# Altium PCB ZYNQ-HS-DEV-PCB.PcbDoc (part 3 of 10)
Units mm, origin at the board's own origin, x right, y up, seen from the top; angles counter-clockwise.
Board outline 125.25 x 111 mm, 10 copper layers (S1 (SIG), S2 (GND), S3 (SIG), S4 (GND), S5 (PWR), S6 (SIG), S7 (GND), S8 (SIG), S9 (GND), S10 (SIG)), stack 1.597 mm thick; 539 components, 408 nets, 2443 pads, 876 vias.
Unrouted connection lines stored in the file: 1310.
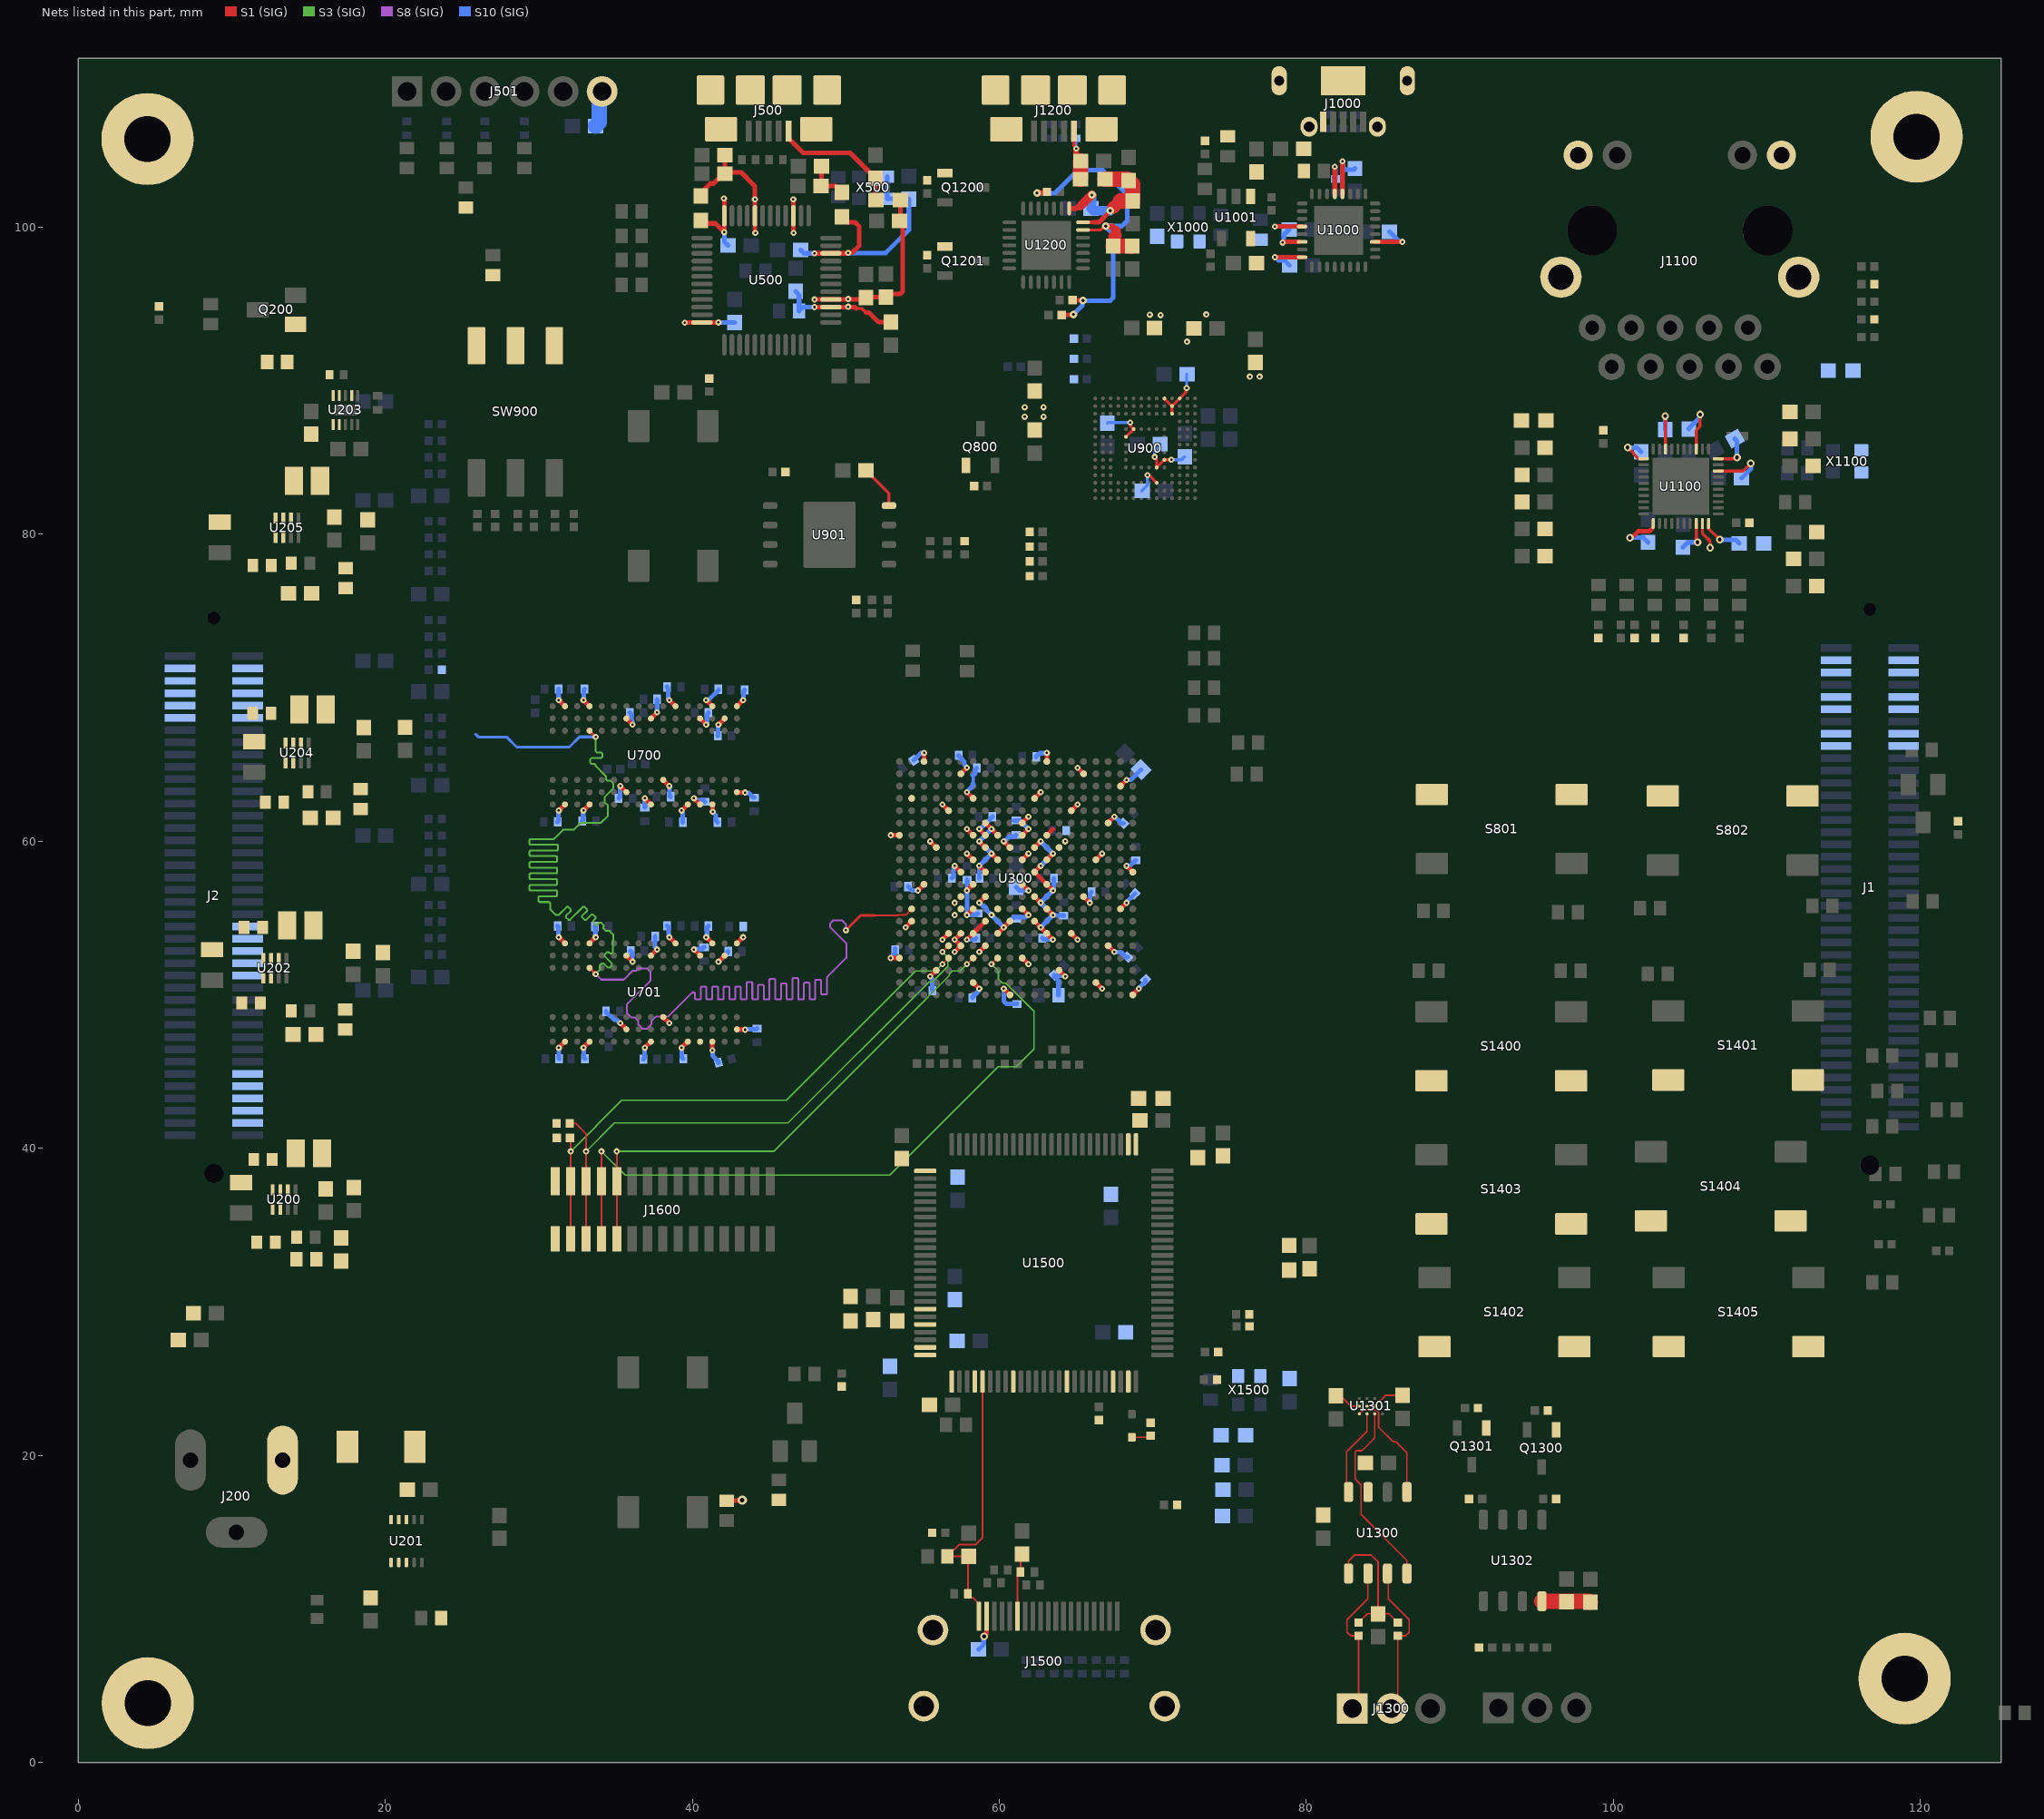
[diagram p8: the nets of this part, all layers, seen from the top]

## Part data
C200 C207 C215 C219: library part GRM1885C1H121JA01D, "CAP CER 120PF 50V C0G/NP0 0603 (1608) ±5%", Manufacturer="Murata Electronics", Package=0603, Tolerance=±5%, Voltage=50V, ComponentLink1Description=Datasheet, ComponentLink1URL=https://search.murata.co.jp/Ceramy/image/img/A01X/G101/ENG/GRM1885C1H121JA01-01.pdf, MPN=GRM1885C1H121JA01D
C201 C202 C208 C209 C212 C214 C216 C217 C220 C221 C602 C603 C714 C719 C736 C741 C1300 C1502 C1507 C1508 C1512: library part GRM188Z71A106MA73D, "CAP CER 10UF 10V X7R 0603 (1608) ±20%", Manufacturer="Murata Electronics", Package=0603, Tolerance=±20%, Voltage=10V, ComponentLink1Description=Datasheet, ComponentLink1URL=https://search.murata.co.jp/Ceramy/image/img/A01X/G101/ENG/GRM188Z71A106MA73-01A.pdf, MPN=GRM188Z71A106MA73D
C203 C210 C218 C222: library part GRM21BR71A475KE51L, "CAP CER 4.7UF 10V X7R 0805 (2012) ±10%", Manufacturer="Murata Electronics", Package=0805, Tolerance=±10%, Voltage=10V, ComponentLink1Description=Datasheet, ComponentLink1URL=https://search.murata.co.jp/Ceramy/image/img/A01X/G101/ENG/GRM21BR71A475KE51-01.pdf, MPN=GRM21BR71A475KE51L
C204 C205 C903 C908 C911 C1518 C1519: library part GRM188R61E105KA12D, "CAP CER 1UF 25V X5R 0603 (1608) ±10%", Manufacturer="Murata Power Solutions Inc.", Package=0603, Tolerance=±10%, Voltage=25V, ComponentLink1Description=Datasheet, ComponentLink1URL=https://search.murata.co.jp/Ceramy/image/img/A01X/G101/ENG/GRM188R61E105KA12-01.pdf, MPN=GRM188R61E105KA12D
C206 C1304: library part GCM188R71H102KA37D, "CAP CER 1000PF 50V X7R 0603 (1608) ±10%", Manufacturer="Murata Electronics", Package=0603, Tolerance=±10%, Voltage=50V, ComponentLink1Description=Datasheet, ComponentLink1URL=https://search.murata.co.jp/Ceramy/image/img/A01X/G101/ENG/GCM188R71H102KA37-01.pdf, MPN=GCM188R71H102KA37D
C211 C500 C502 C504 C508 C510 C511 C512 C513 C514 C515 C516 C607 C608 C609 C610 C611 C612 C701 C702 C703 C704 C705 C707 C708 C709 C710 C711 C712 C713 C716 C717 C718 C721 C722 C723 C725 C726 C727 C728 C729 C731 C732 C733 C734 C735 C738 C739 C740 C743 C744 C745 C800 C801 C802 C803 C804 C805 C806 C900 C901 C902 C905 C906 C907 C910 C912 C1000 C1002 C1003 C1004 C1005 C1007 C1100 C1102 C1103 C1105 C1107 C1108 C1109 C1111 C1113 C1115 C1116 C1200 C1202 C1301 C1302 C1303 C1305 C1500 C1501 C1503 C1504 C1505 C1506 C1509 C1510 C1511 C1513 C1514 C1515 C1516 C1517: library part GRM155R71C104KA88J, "CAP CER 0.1UF 16V X7R 0402 (1005) ±10%", Manufacturer="Murata Electronics", Package=0402, Tolerance=±10%, Voltage=16V, ComponentLink1Description=Datasheet, ComponentLink1URL=https://search.murata.co.jp/Ceramy/image/img/A01X/G101/ENG/GRM155R71C104KA88-01.pdf, MPN=GRM155R71C104KA88J
C213 C300 C306 C307 C308 C309 C310 C313 C318 C319 C320 C321 C327 C328 C329 C330 C333 C337 C338 C339 C340 C341 C342 C343 C344 C347 C353 C354 C355 C356 C600 C601 C715 C720 C737 C742 C1001: library part GRM155R60J474KE19D, "CAP CER 0.47UF 6.3V X5R 0402(1005) ±10%", Manufacturer="Murata Electronics", Package=0402, Tolerance=±10%, Voltage=6.3V, ComponentLink1Description=Datasheet, ComponentLink1URL=https://search.murata.co.jp/Ceramy/image/img/A01X/G101/ENG/GRM21BR71A475KE51-01.pdf, MPN=GRM155R60J474KE19D
C301: library part GRM188R60G106ME47D, "CAP CER 10UF 4V X5R 0603 (1608) ±20%", Manufacturer="Murata Electronics", Package=0603, Tolerance=±20%, Voltage=4V, ComponentLink1Description=Datasheet, ComponentLink1URL=https://search.murata.co.jp/Ceramy/image/img/A01X/G101/ENG/GRM188R60G106ME47-01.pdf, MPN=GRM188R60G106ME47D
C302 C316 C324 C334 C350: library part GRM32ER70J476ME20L, "CAP CER 47UF 6.3V X7R 1210 1210 (3225) ±20%", Manufacturer="Murata Electronics", Package=1210, Tolerance=±20%, Voltage=6.3V, ComponentLink1Description=Datasheet, ComponentLink1URL=https://search.murata.co.jp/Ceramy/image/img/A01X/G101/ENG/GRM32ER70J476ME20-01.pdf, MPN=GRM32ER70J476ME20L
C303: library part T525D337M006ATE025, "CAP TANT POLY 330UF 6.3V 2917 (7343) ±20%", Manufacturer=KEMET, Package=2917, Tolerance=±20%, Voltage="6.3 V", ComponentLink1Description=Datasheet, ComponentLink1URL=https://search.kemet.com/download/specsheet/T525D337M006ATE025, ESR="25mOhm @ 100kHz", MPN=T525D337M006ATE025
C304 C305 C311 C314 C317 C322 C325 C326 C332 C335 C336 C345 C348 C351 C352 C501 C503 C505 C506 C507 C509 C604 C605 C606 C904 C909 C1006 C1101 C1104 C1106 C1110 C1112 C1114 C1201 C1203 C1204 C1205 C1306: library part CL10A475KP8NNNC, "CAP CER 4.7UF 10V X5R 0603 (1608) ±10%", Manufacturer="Samsung Electro-Mechanics", Package=0603, Tolerance=±10%, Voltage=10V, ComponentLink1Description=Datasheet, ComponentLink1URL=https://mm.digikey.com/Volume0/opasdata/d220001/medias/docus/609/CL10A475KP8NNNC_Spec.pdf, MPN=CL10A475KP8NNNC
C312 C315 C323 C331 C346 C349: library part GRM32EE70G107ME19L, "CAP CER 100UF 4V X7U 1210 (3225) ±20%", Manufacturer="Murata Electronics", Package=1210, Tolerance=±20%, Voltage=4V, ComponentLink1Description=Datasheet, ComponentLink1URL=https://search.murata.co.jp/Ceramy/image/img/A01X/G101/ENG/GRM32EE70G107ME19-01.pdf, MPN=GRM32EE70G107ME19L
C357: library part CC0805KRX7RCBB102, "CAP CER 1000PF 1KV X7R 0805 (2012) ±10%", Manufacturer=YAGEO, Package=0805, Tolerance=±10%, Voltage=1kV, ComponentLink1Description=Datasheet, ComponentLink1URL=https://search.murata.co.jp/Ceramy/image/img/A01X/G101/ENG/GRM21BR71A475KE51-01.pdf, MPN=CC0805KRX7RCBB102
C1008 C1117 C1520: library part C0603C104K5RACTU, "CAP CER 0.1UF 50V X7R 0603 (1608) ±10%", Manufacturer=KEMET, Package=0603, Tolerance=±10%, Voltage=50V, ComponentLink1Description=Datasheet, ComponentLink1URL=https://yageogroup.com/content/datasheet/asset/file/KEM_C1002_X7R_SMD, MPN=C0603C104K5RACTU
D200: library part CMS04, "Diode 30 V 5A Surface Mount M-FLAT (2.4x3.8)", Manufacturer="Toshiba Semiconductor and Storage", MPN=CMS04(TE12L,Q, Package=SOD-123, ComponentLink1Description=Datasheet, ComponentLink1URL=https://toshiba.semicon-storage.com/info/CMS04_datasheet_en_20180911.pdf?did=3133&prodName=CMS04
D201 D400 D800 D1003 D1400 D1401 D1402: library part LTST-C191TGKT, "LED GREEN CLEAR CHIP SMD", Manufacturer="Lite-On Inc.", Package=0603, ComponentLink1Description=Datasheet, ComponentLink1URL=https://optoelectronics.liteon.com/upload/download/DS22-2000-300/LTST-C191TGKT.PDF, MPN=LTST-C191TGKT
D500 D501 D502 D503 D504 D505 D1000 D1001 D1002 D1200 D1201 D1202 D1501 D1502 D1503 D1504 D1505 D1506 D1507 D1508 D1509 D1510 D1511 D1512 D1513: "Varistor 1 Circuit Surface Mount, MLCV 0402 (1005 Metric)", Manufacturer="EPCOS - TDK Electronics", Package=0402, ComponentLink1Description=Datasheet, ComponentLink1URL=https://www.tdk-electronics.tdk.com/inf/75/ds/High_speed_series.pdf?ref_disty=digikey, MPN=B72590D0050H160
D1500: "DIODE STANDARD 100V 200MA SOD523", Manufacturer=onsemi, Package=SOD-523, ComponentLink1Description=Datasheet, ComponentLink1URL=https://www.onsemi.com/pdf/datasheet/bas16xv2t1-d.pdf, MPN=BAS16XV2T1G
FB300: library part BLM18SG121TN1D, "FERRITE BEAD 120 OHM 0603 (1608) 3A 25mOhm", Current Rating (Max)=3A, DC Resistance (DCR) (Max)=25mOhm, Manufacturer="Murata Electronics", Package=0603, ComponentLink1Description=Datasheet, ComponentLink1URL=https://pim.murata.com/asset/pim4/ferriteBeadInductortypefilter/ENFA0003_PDF_FERRITEBEADINDUCTORTYPEFILTER?lastModifiedDatetime=20250707190934, ComponentLink2Description=Website, ComponentLink2URL=https://pim.murata.com/en-global/pim/details/?partNum=BLM18SG121TN1%23, MPN=BLM18SG121TN1D, Impedance @ Frequency="120 Ohms @ 100 MHz"
FB500 FB501 FB502 FB1100 FB1101 FB1200 FB1500 FB1501 FB1502 FB1503: library part BLM18SG121TN1D, "FERRITE BEAD 120 OHM 0603 (1608) 3A 25mOhm", Current Rating (Max)=3A, DC Resistance (DCR) (Max)=25mOhm, Manufacturer="Murata Electronics", Package=0603, Impedance @ Frequency="120 Ohms @ 100 MHz", ComponentLink1Description=Datasheet, ComponentLink1URL=https://pim.murata.com/asset/pim4/ferriteBeadInductortypefilter/ENFA0003_PDF_FERRITEBEADINDUCTORTYPEFILTER?lastModifiedDatetime=20250707190934, ComponentLink2Description=Website, ComponentLink2URL=https://pim.murata.com/en-global/pim/details/?partNum=BLM18SG121TN1%23, MPN=BLM18SG121TN1D
J1 J2: "BergStak® Lite 0.80mm, Board-to-Board Connector, 80 Positions, Dual Row, Vertical Header", Manufacturer=Amphenol, MPN=10144518-082802LF
J200: "CONNECTOR DC JACK POWER PCB TYPE 2.50MM KLS", Manufacturer="KLS ELECTRONIC", MPN=L-KLS1-DC-005A-2.0, ComponentLink1Description=Datasheet, ComponentLink1URL=https://www.ozdisan.com/api/pdf/product/assets/KLS1-DC-005A.pdf
J500 J1200: library part USB-MICRO-B, "CONN RCPT USB2.0 MICRO B SMD R/A", Manufacturer="Amphenol ICC (FCI)", ComponentLink1Description=Datasheet, ComponentLink1URL=https://cdn.amphenol-cs.com/media/wysiwyg/files/documentation/datasheet/inputoutput/io_usb_micro.pdf, MPN=10118192-0001LF
J501: library part JTAG-HEADER, "JTAG CONN HEADER VERT 6POS 2.54MM"
J1000: library part USB-MICRO-AB, "CONN RCPT MICRO USB AB 5P SMD RA", Manufacturer=Molex, ComponentLink1Description=Datasheet, ComponentLink1URL=https://www.molex.com/content/dam/molex/molex-dot-com/products/automated/en-us/salesdrawingpdf/475/47590/475900001_sd.pdf?inline, MPN=0475900001
J1100: "Jack Modular Connector RJ45 Through Hole Shielded", Manufacturer=Hanrun, ComponentLink1Description=Datasheet, ComponentLink1URL=https://www.lcsc.com/datasheet/C55679.pdf, MPN=HY911130A
J1300 J1301: library part 282834-3, "TERM BLK 3P SIDE ENT 2.54MM PCB"
J1500: "CONN RCPT 1.4 HDMI 19POS SMD R/A", Manufacturer="Amphenol ICC (FCI)", ComponentLink1Description=Datasheet, ComponentLink1URL=https://cdn.amphenol-cs.com/media/wysiwyg/files/documentation/datasheet/inputoutput/io_hdmi_receptacles.pdf, ComponentLink2Description=Drawing, ComponentLink2URL=https://cdn.amphenol-cs.com/media/wysiwyg/files/drawing/10029449.pdf, ComponentLink3Description="Product Specification", ComponentLink3URL=https://cdn.amphenol-cs.com/media/wysiwyg/files/documentation/gs-12-309.pdf, MPN=10029449-111RLF
J1600: "CONN FPC VERT 15POS 1MM SMD", Manufacturer="TE Connectivity AMP Connectors", ComponentLink2Description=Drawing, ComponentLink2URL=https://www.te.com/commerce/DocumentDelivery/DDEController?Action=srchrtrv&DocNm=1734248&DocType=Customer%20Drawing&DocLang=English&DocFormat=pdf&PartCntxt=1-1734248-5, ComponentLink3Description="Product Specification", ComponentLink3URL=https://www.te.com/commerce/DocumentDelivery/DDEController?Action=srchrtrv&DocNm=108-57080&DocType=Specification%20Or%20Standard&DocLang=English&DocFormat=pdf&PartCntxt=1-1734248-5, MPN=1-1734248-5
L200 L201 L202 L203: library part DFE201610E-R47M=P2, "FIXED IND 470NH 3.6A 32 MOHM SMD 0806 (2016 Metric)", Current - Saturation (Isat)=4.8A, Current Rating (Max)="3.6 A", DC Resistance (DCR) (Max)=32mOhm, Manufacturer="Murata Electronics", MPN=DFE201610E-R47M=P2, Package=0806, Inductance="470 nH", ComponentLink1Description=Datasheet, ComponentLink1URL=https://pim.murata.com/asset/pim4/inductor/J(E)TE243A-0001_PDF_INDUCTOR?lastModifiedDatetime=20250708072022, ComponentLink2Description=Website, ComponentLink2URL=https://pim.murata.com/en-global/pim/details/?partNum=DFE201610E-R47M%23
L1100: library part LQM18PN2R2MGHD, "FIXED IND 2.2UH 1.05A 250 MOHM 0603 (1608 Metric)", Current - Saturation (Isat)=250mA, Current Rating (Max)="1.05 A", DC Resistance (DCR) (Max)=250mOhm, Manufacturer="Murata Electronics", Package=0603, Inductance="2.2 µH", ComponentLink1Description=Datasheet, ComponentLink1URL=https://search.murata.co.jp/Ceramy/image/img/P02/JELF243B-0047.pdf, ComponentLink2Description=Website, ComponentLink2URL=https://pim.murata.com/en-eu/pim/details/?partNum=LQM18PN2R2MGHD, MPN=LQM18PN2R2MGHD
Q200 Q400 Q801: "N-Channel 20 V 1.3A (Ta) 500mW (Ta) Surface Mount SOT-23-3", Drain to Source Voltage (Vdss)="20 V", Manufacturer=onsemi, Package=SOT-23-3, ComponentLink1Description=Datasheet, ComponentLink1URL=https://www.onsemi.com/pdf/datasheet/nds331n-d.pdf, MPN=NDS331N, Rds On (Max) @ Id, Vgs="160mOhm @ 1.5A, 4.5V", Vgs (Max)=±8V
Q800 Q1200 Q1201 Q1300 Q1301: "N-Channel 50 V 200mA (Ta) 225mW (Ta) Surface Mount SOT-23-3 (TO-236)", Drain to Source Voltage (Vdss)="50 V", Manufacturer=onsemi, Package=SOT-23-3, ComponentLink1Description=Datasheet, ComponentLink1URL=https://www.onsemi.com/pdf/datasheet/bss138lt1-d.pdf, MPN=BSS138LT1G, Rds On (Max) @ Id, Vgs="3.5Ohm @ 200mA, 5V", Vgs (Max)=±20V
R200 R202 R204 R205 R207 R208 R209 R213 R214 R215 R217 R218: library part CRCW0603100KFKEA, "RES SMD 100K OHM 1% 1/8W 0603 (1608)", Manufacturer="Vishay Dale", Package=0603, Tolerance=±1%, Voltage=75V, ComponentLink1Description=Datasheet, ComponentLink1URL=https://www.vishay.com/docs/20035/dcrcwe3.pdf, MPN=CRCW0603100KFKEA
R201: library part CRCW060366K5FKEA, "RES SMD 66.5K OHM 1% 1/8W 0603 (1608)", Manufacturer="Vishay Dale", Package=0603, Tolerance=±1%, Voltage=75V, ComponentLink1Description=Datasheet, ComponentLink1URL=https://www.vishay.com/docs/20035/dcrcwe3.pdf, MPN=CRCW060366K5FKEA
R203 R300: library part CRCW06031M00FKEA, "RES SMD 1M OHM 1% 1/8W 0603 (1608)", Manufacturer="Vishay Dale", Package=0603, Tolerance=±1%, Voltage=75V, ComponentLink1Description=Datasheet, ComponentLink1URL=https://www.vishay.com/docs/20035/dcrcwe3.pdf, MPN=CRCW06031M00FKEA
R206: library part CRCW0603200KFKEBC, "RES 200K OHM 1% 1/10W 0603 (1608)", Manufacturer="Vishay Dale", Package=0603, Tolerance=±1%, Voltage=75V, ComponentLink1Description=Datasheet, ComponentLink1URL=https://www.vishay.com/docs/28773/crcwce3.pdf, MPN=CRCW0603200KFKEBC
R210 R404 R819 R916 R917 R918 R919 R920 R1110 R1111 R1112 R1113 R1114 R1118 R1122 R1400 R1401 R1402 R1407: library part RC0402JR-071KL, "RES 1K OHM 5% 1/16W 0402 (1005)", Manufacturer=YAGEO, Package=0402, Tolerance=±5%, Voltage=50V, ComponentLink1Description=Datasheet, ComponentLink1URL=https://yageogroup.com/content/datasheet/asset/file/PYU-RT_1-TO-0-01_ROHS_L, MPN=RC0402JR-071KL
R211 R400 R401 R402 R403 R820 R821 R822 R823 R824 R1004 R1403 R1404 R1405 R1406 R1408 R1409 R1410 R1411 R1412 R1413 R1414 R1415 R1505: library part RC0603FR-0710KL, "RES 10K OHM 1% 1/10W 0603(1608)", Manufacturer=YAGEO, Package=0603, Tolerance=±1%, Voltage=75V, ComponentLink1Description=Datasheet, ComponentLink1URL=https://yageogroup.com/content/datasheet/asset/file/PYU-RC_GROUP_51_ROHS_L, MPN=RC0603FR-0710KL
R212: library part CRCW0603124KFKEA, "RES SMD 124K OHM 1% 1/8W 0603 (1608)", Manufacturer="Vishay Dale", Package=0603, Tolerance=±1%, Voltage=75V, ComponentLink1Description=Datasheet, ComponentLink1URL=https://www.vishay.com/docs/20035/dcrcwe3.pdf, MPN=CRCW0603124KFKEA
R216: library part CRCW0603453KFKEAC, "RES 453K OHM 1% 1/10W 0603(1608)", Manufacturer="Vishay Dale", Package=0603, Tolerance=±1%, Voltage=75V, ComponentLink1Description=Datasheet, ComponentLink1URL=https://www.vishay.com/docs/28773/crcwce3.pdf, MPN=CRCW0603453KFKEAC
R405: library part RC0603FR-07330RL, "RES 330 OHM 1% 1/10W 0603(1608)", Manufacturer=YAGEO, Package=0603, Tolerance=±1%, Voltage=75V, ComponentLink1Description=Datasheet, ComponentLink1URL=https://yageogroup.com/content/datasheet/asset/file/PYU-RC_GROUP_51_ROHS_L, MPN=RC0603FR-07330RL
R500 R501 R502 R503 R505 R506 R507 R509 R510 R806 R809 R811 R812 R813 R814 R815 R816 R817 R1002 R1104 R1105 R1106 R1107 R1108 R1109 R1117 R1119 R1121 R1510: library part RC0603FR-0722RL, "RES 22 OHM 1% 1/10W 0603 (1608)", Manufacturer=YAGEO, Package=0603, Tolerance=±1%, Voltage=75V, ComponentLink1Description=Datasheet, ComponentLink1URL=https://yageogroup.com/content/datasheet/asset/file/PYU-RC_GROUP_51_ROHS_L, MPN=RC0603FR-0722RL
R504 R508: library part RC0603FR-0712KL, "RES 12K OHM 1% 1/10W 0603 (1608)", Manufacturer=YAGEO, Package=0603, Tolerance=±1%, Voltage=75V, ComponentLink1Description=Datasheet, ComponentLink1URL=https://yageogroup.com/content/datasheet/asset/file/PYU-RC_GROUP_51_ROHS_L, MPN=RC0603FR-0712KL
R600 R601 R602 R603 R604 R605 R606 R607 R608 R609 R610 R611 R612 R613 R614 R615 R616 R617 R618 R619 R620 R621 R622 R623: library part RC0402FR-0740R2L, "RES 40.2 OHM 1% 1/16W 0402 (1005)", Manufacturer=YAGEO, Package=0402, Tolerance=±1%, Voltage=50V, ComponentLink1Description=Datasheet, ComponentLink1URL=https://yageogroup.com/content/datasheet/asset/file/PYU-RC_GROUP_51_ROHS_L, MPN=RC0402FR-0740R2L
R624 R625 R627: library part RT0402FRE0780RL, "RES 80 OHM 1% 1/16W 0402 (1005)", Manufacturer=YAGEO, Package=0402, Tolerance=±1%, Voltage=50V, ComponentLink1Description=Datasheet, ComponentLink1URL=https://yageogroup.com/content/datasheet/asset/file/PYU-RT_1-TO-0-01_ROHS_L, MPN=RT0402FRE0780RL
R626 R1100 R1101 R1103 R1115 R1116 R1120 R1200 R1201 R1202 R1203 R1204 R1302 R1303 R1306 R1307 R1604 R1605: library part RC0402JR-074K7L, "RES 4.7K OHM 5% 1/16W 0402 (1005)", Manufacturer=YAGEO, MPN=RT0402FRE0780RL, Package=0402, Tolerance=±5%, Voltage=50V, ComponentLink1Description=Datasheet, ComponentLink1URL=https://yageogroup.com/content/datasheet/asset/file/PYU-RC_GROUP_51_ROHS_L
R700 R701: library part RC0402FR-07240RL, "RES 240 OHM 1% 1/16W 0402 (1005)", Manufacturer=YAGEO, Package=0402, Tolerance=±1%, Voltage=50V, ComponentLink1Description=Datasheet, ComponentLink1URL=https://yageogroup.com/content/datasheet/asset/file/PYU-RC_GROUP_51_ROHS_L, MPN=RC0402FR-07240RL
R800 R801 R802 R803 R804 R805 R807 R808 R810 R818 R900 R901 R902 R903 R904 R905 R906 R908 R911 R912 R913 R914 R915 R1003 R1006: library part RC0402FR-0720KL, "RES 20K OHM 1% 1/16W 0402 (1005)", Manufacturer=YAGEO, Package=0402, Tolerance=±1%, Voltage=50V, ComponentLink1Description=Datasheet, ComponentLink1URL=https://yageogroup.com/content/datasheet/asset/file/PYU-RT_1-TO-0-01_ROHS_L, MPN=RC0402FR-0720KL
R907 R909 R910 R1102 R1304 R1308: library part DNP_RES, "DO NOT POPULATE RESISTOR", Manufacturer=***, Package=0402, ComponentLink1Description=Datasheet, ComponentLink1URL=https://yageogroup.com/content/datasheet/asset/file/PYU-RT_1-TO-0-01_ROHS_L, MPN=***, Tolerance=***, Voltage=***
R1000 R1001: library part RC0603FR-071KL, "RES 1K OHM 1% 1/10W 0603 (1608)", Manufacturer=YAGEO, Package=0603, Tolerance=±1%, Voltage=75V, ComponentLink1Description=Datasheet, ComponentLink1URL=https://yageogroup.com/content/datasheet/asset/file/PYU-RC_GROUP_51_ROHS_L, MPN=RC0603FR-071KL
R1005: library part RC0402FR-138K06L, "RES 8.06K OHM 1% 1/16W 0402 (1005)", Manufacturer=YAGEO, Package=0402, Tolerance=±1%, Voltage=50V, ComponentLink1Description=Datasheet, ComponentLink1URL=https://yageogroup.com/content/datasheet/asset/file/PYU-RT_1-TO-0-01_ROHS_L, MPN=RC0402FR-138K06L
R1123 R1503 R1504 R1506 R1507 R1508: library part RC0402FR-132K49L, "RES 2.49K OHM 1% 1/16W 0402 (1005)", Manufacturer=YAGEO, Package=0402, Tolerance=±1%, Voltage=50V, ComponentLink1Description=Datasheet, ComponentLink1URL=https://yageogroup.com/content/datasheet/asset/file/PYU-RC_GROUP_51_ROHS_L, MPN=RC0402FR-132K49L
R1300 R1301: library part RC0402FR-0760R4L, "RES 60.4 OHM 1% 1/16W 0402 (1005)", Manufacturer=YAGEO, Package=0402, Tolerance=±1%, Voltage=50V, ComponentLink1Description=Datasheet, ComponentLink1URL=https://yageogroup.com/content/datasheet/asset/file/PYU-RC_GROUP_51_ROHS_L, MPN=RC0402FR-0760R4L
R1305: library part RC0402FR-07120RL, "RES 120 OHM 1% 1/16W 0402 (1005)", Manufacturer=YAGEO, Package=0402, Tolerance=±1%, Voltage=50V, ComponentLink1Description=Datasheet, ComponentLink1URL=https://yageogroup.com/content/datasheet/asset/file/PYU-RC_GROUP_51_ROHS_L, MPN=RC0402FR-07120RL
R1500: library part RC0402FR-0727KL, "RES 27K OHM 1% 1/16W 0402 (1005)", Manufacturer=YAGEO, Package=0402, Tolerance=±1%, Voltage=50V, ComponentLink1Description=Datasheet, ComponentLink1URL=https://yageogroup.com/content/datasheet/asset/file/PYU-RC_GROUP_51_ROHS_L, MPN=RC0402FR-0727KL
R1501 R1502: library part RC0402FR-0749R9L, "RES 49.9 OHM 1% 1/16W 0402 (1005)", Manufacturer=YAGEO, Package=0402, Tolerance=±1%, Voltage=50V, ComponentLink1Description=Datasheet, ComponentLink1URL=https://yageogroup.com/content/datasheet/asset/file/PYU-RC_GROUP_51_ROHS_L, MPN=RC0402FR-0749R9L
R1509: library part RC0603FR-07887RL, "RES 887 OHM 1% 1/10W 0603 (1608)", Manufacturer=YAGEO, Package=0603, Tolerance=±1%, Voltage=75V, ComponentLink1Description=Datasheet, ComponentLink1URL=https://yageogroup.com/content/datasheet/asset/file/PYU-RC_GROUP_51_ROHS_L, MPN=RC0603FR-07887RL
R1600 R1602 R1603 R1607 R1608 R1610: library part RC0402FR-07100RL, "RES 100 OHM 1% 1/16W 0402 (1005)", Manufacturer=YAGEO, Package=0402, Tolerance=±1%, Voltage=50V, ComponentLink1Description=Datasheet, ComponentLink1URL=https://yageogroup.com/content/datasheet/asset/file/PYU-RC_GROUP_51_ROHS_L, MPN=RC0402FR-07100RL
R1601 R1606 R1609: library part RC0402FR-07150RL, "RES 150 OHM 1% 1/16W 0402 (1005)", Manufacturer=YAGEO, Package=0402, Tolerance=±1%, Voltage=50V, ComponentLink1Description=Datasheet, ComponentLink1URL=https://yageogroup.com/content/datasheet/asset/file/PYU-RC_GROUP_51_ROHS_L, MPN=RC0402FR-07150RL
S400 S800 S801 S802 S1400 S1401 S1402 S1403 S1404 S1405: "SWITCH TACTILE SPST-NO 0.05A 12V", Manufacturer=E-Switch, ComponentLink1Description=Datasheet, ComponentLink1URL=https://configured-product-images.s3.amazonaws.com/Datasheets/TL3301.pdf, MPN=TL3301EF100QG
SW900: "Dip Switch SPST 3 Position Surface Mount Slide (Standard) Actuator 100mA 20VDC", Manufacturer="CTS Electrocomponents", ComponentLink1Description=Datasheet, ComponentLink1URL=https://www.ctscorp.com/Files/DataSheets/Switches/DIP-Switches/CTS-Switches-DIP-219-Series-Datasheet.pdf, MPN=219-3LPST
U200 U202 U204 U205: "2.4-V to 5.5-V input, 3-A step-down converter with 1% accuracy in 1.5-mm x 2-mm VSON-HR package", Manufacturer="Texas Instruments", ComponentLink1Description=Datasheet, ComponentLink1URL=https://www.ti.com/lit/ds/symlink/tps62823.pdf, ComponentLink2Description="Evaluation Module", ComponentLink2URL=https://www.ti.com/lit/ug/slvuba0/slvuba0.pdf, MPN=TPS62823DLCR
U201: "Electronic Fuse Regulator 5A 10-VSON (3x3)", Manufacturer="Texas Instruments", ComponentLink1Description=Datasheet, ComponentLink1URL=https://www.ti.com/lit/ds/symlink/tps25925.pdf?HQS=dis-dk-null-digikeymode-dsf-pf-null-wwe&ts=1768606527240&ref_url=https%253A%252F%252Fwww.ti.com%252Fgeneral%252Fdocs%252Fsuppproductinfo.tsp%253FdistId%253D10%2526gotoUrl%253Dhttps%253A%252F%252Fwww.ti.com%252Flit%252Fgpn%252Ftps25925, ComponentLink2Description="Evaluation Module", ComponentLink2URL=https://www.ti.com/lit/ug/sluub64/sluub64.pdf?ts=1768615249837, MPN=TPS259250DRCR
U203: library part TPS51206, "Converter, DDR Voltage Regulator IC 1 Output 10-WSON (2x2)", Manufacturer="Texas Instruments", Package=10-WSON, ComponentLink1Description=Datasheet, ComponentLink1URL=https://www.ti.com/lit/ds/symlink/tps51206.pdf?HQS=dis-dk-null-digikeymode-dsf-pf-null-wwe&ts=1769211972272&ref_url=https%253A%252F%252Fwww.ti.com%252Fgeneral%252Fdocs%252Fsuppproductinfo.tsp%253FdistId%253D10%2526gotoUrl%253Dhttps%253A%252F%252Fwww.ti.com%252Flit%252Fgpn%252Ftps51206, MPN=TPS51206DSQR
U300: "Dual ARM® Cortex®-A9 MPCore™ with CoreSight™ System On Chip (SOC) IC Zynq®-7000 Artix™-7 FPGA, 85K Logic Cells 766MHz 400-CSPBGA (17x17)", Manufacturer=AMD/XILINX, ComponentLink1Description=Datasheet, ComponentLink1URL=https://docs.amd.com/v/u/en-US/ds190-Zynq-7000-Overview, ComponentLink2Description="DC and AC Switching Characteristics", ComponentLink2URL=https://docs.amd.com/v/u/en-US/ds187-XC7Z010-XC7Z020-Data-Sheet, ComponentLink3Description="PCB Design Guide", ComponentLink3URL=https://docs.amd.com/v/u/en-US/ug933-Zynq-7000-PCB, ComponentLink4Description="Packaging and Pinout", ComponentLink4URL=https://docs.amd.com/v/u/en-US/ug865-Zynq-7000-Pkg-Pinout, ComponentLink5Description="Zynq 7000 SoC Technical Reference Manual", ComponentLink5URL=https://docs.amd.com/r/en-US/ug585-zynq-7000-SoC-TRM, MPN=XC7Z020-2CLG400I
U500: "USB Bridge, USB to UART (JTAG),FIFO USB 2.0 UART, FIFO Interface 48-LQFP (7x7)", Manufacturer="FTDI, Future Technology Devices International Ltd", MPN=FT232HL-REEL, ComponentLink1Description=Datasheet, ComponentLink1URL=https://ftdichip.com/wp-content/uploads/2024/09/DS_FT232H.pdf#page=51&zoom=100,72,126
U700 U701: "SDRAM - DDR3L Memory IC 4Gbit Parallel 933 MHz 20 ns 96-FBGA (8x14)", Manufacturer="Micron Technology Inc.", ComponentLink1Description=Datasheet, ComponentLink1URL=https://datasheet.octopart.com/MT41K256M16TW-107%3AP-Micron-datasheet-149527670.pdf, MPN="MT41K256M16TW-107 IT:P"
U800 U803: "IC BUFFER NON-INVERT 5.5V SC-88A", Manufacturer=onsemi, ComponentLink1Description=Datasheet, ComponentLink1URL=https://www.onsemi.com/pdf/datasheet/nl17sz17-d.pdf, MPN=NL17SZ17DFT2G
U802: "IC BUFFER NON-INVERT 5.5V SC-88", Manufacturer=onsemi, ComponentLink1Description=Datasheet, ComponentLink1URL=https://www.onsemi.com/pdf/datasheet/nc7wz07-d.pdf, MPN=NC7WZ07P6X
U900: "FLASH - NAND (MLC) Memory IC 64Gbit eMMC_5.1 200 MHz 153-FBGA (11.5x13)", Manufacturer="Flexxon Pte Ltd", ComponentLink1Description=Datasheet, ComponentLink1URL=https://mm.digikey.com/Volume0/opasdata/d220001/medias/docus/6348/FLEXXON%20eMMC%205.1%20MLC%20%28XTRA%20III%20153ball%29%20SPEC%20V1.9.pdf, ComponentLink2Description="eMMC Design Guide", ComponentLink2URL=https://www.flexxon.com/wp-content/uploads/Technical%20Info/FLEXXON%20eMMC%20Design%20Guide%20(XTRA%20III%20153Balls)%20V1.2.pdf?x72842, MPN=FEMC008GSTE9-T14-16
U901: "FLASH - NOR Memory IC 256Mbit SPI - Quad I/O 133 MHz 8-WSON (8x6)", Manufacturer="Winbond Electronics", ComponentLink1Description=Datasheet, ComponentLink1URL=https://www.winbond.com/resource-files/w25q256jv%20spi%20revg%2008032017.pdf, MPN=W25Q256JVEIQ
U1000: "Hi-Speed USB 2.0 ULPI Transceiver", Manufacturer=Microchip, ComponentLink1Description=Datasheet, ComponentLink1URL=https://ww1.microchip.com/downloads/aemDocuments/documents/UNG/ProductDocuments/DataSheets/USB3320-Data-Sheet-DS00001792.pdf, MPN=USB3320C-EZK-TR
U1001: "Power Switch/Driver 1:1 N-Channel 500mA SOT-23-5", Manufacturer="Texas Instruments", ComponentLink1Description=Datasheet, ComponentLink1URL=https://www.ti.com/lit/ds/symlink/tps2051b.pdf?ts=1769451796682&ref_url=https%253A%252F%252Fwww.ti.com%252Fproduct%252FTPS2051B, MPN=TPS2051BDBVR
U1100: "RGMII Ethernet Transceiver WQFN-40-EP(5x5) Drivers, Receivers, Transceivers RoHS", Manufacturer=REALTEK, ComponentLink1Description=Datasheet, ComponentLink1URL=https://www.lcsc.com/datasheet/C187932.pdf, MPN=RTL8211F-CG
U1200: "USB Bridge, USB to UART USB 2.0 UART Interface 28-QFN (5x5)", Manufacturer="Silicon Labs", ComponentLink1Description=Datasheet, ComponentLink1URL=https://www.silabs.com/documents/public/data-sheets/CP2102-9.pdf, MPN=CP2102-GM
U1300: "CAN Interface IC High-Speed CAN Transceiver with Standby Mode SOIC8", Manufacturer="NXP USA Inc.", ComponentLink1Description=Datasheet, ComponentLink1URL=https://www.nxp.com/docs/en/data-sheet/TJA1040.pdf, MPN=TJA1040T/CM,118
U1301: "Voltage Level Translator Bidirectional 1 Circuit 4 Channel 24Mbps 12-DSBGA (1.9x1.4)", Manufacturer="Texas Instruments", ComponentLink1Description=Datasheet, ComponentLink1URL=https://www.ti.com/lit/ds/symlink/txs0104e.pdf?HQS=dis-dk-null-digikeymode-dsf-pf-null-wwe&ts=1769494565851&ref_url=https%253A%252F%252Fwww.ti.com%252Fgeneral%252Fdocs%252Fsuppproductinfo.tsp%253FdistId%253D10%2526gotoUrl%253Dhttps%253A%252F%252Fwww.ti.com%252Flit%252Fgpn%252Ftxs0104e, MPN=TXS0104EYZTR
U1302: "1/1 Transceiver Half RS422, RS485 8-SOIC", Manufacturer="Analog Devices Inc./Maxim Integrated", ComponentLink1Description=Datasheet, ComponentLink1URL=https://www.analog.com/media/en/technical-documentation/data-sheets/max3483-max3491.pdf, MPN=MAX3485ESA+T
U1500: "225 MHz, High Performance HDMI® Transmitter with ARC", Manufacturer="Analog Devices Inc./Maxim Integrated", ComponentLink1Description=Datasheet, ComponentLink1URL=https://www.analog.com/media/en/technical-documentation/data-sheets/ADV7511.pdf, ComponentLink2Description="Hardware User's Guide", ComponentLink2URL=https://www.analog.com/media/en/technical-documentation/user-guides/ADV7511_Hardware_Users_Guide.pdf, ComponentLink3Description="HDMI-Enabled Designs Using the ADV7511", ComponentLink3URL=https://www.analog.com/media/en/technical-documentation/evaluation-documentation/hdmi-enabled_designs_using_adv7511.pdf, ComponentLink4Description="Design Support Files", ComponentLink4URL=https://ez.analog.com/video/w/documents/794/adv7511-design-support-files, MPN=ADV7511KSTZ
X500 X1000 X1500: "XTAL OSC XO 12.0000MHZ CMOS SMD", Manufacturer="ECS Inc.", ComponentLink1Description=Datasheet, ComponentLink1URL=https://ecsxtal.com/store/pdf/ECS-2520MV.pdf, MPN=ECS-2520MV-120-BN-TR
X800: "33.3333 MHz XO (Standard) HCMOS, LVCMOS Oscillator 1.6V ~ 3.6V Enable/Disable 4-SMD, No Lead", Manufacturer="Abracon LLC", ComponentLink1Description=Datasheet, ComponentLink1URL=https://abracon.com/datasheets/ASDDV.pdf, MPN=ASDDV-33.3333MHZ-LC-T
X1100: "25 MHz XO (Standard) HCMOS, LVCMOS Oscillator 1.6V ~ 3.6V Enable/Disable 4-SMD, No Lead", Manufacturer="Abracon LLC", ComponentLink1Description=Datasheet, ComponentLink1URL=https://abracon.com/datasheets/ASDDV.pdf, MPN=ASDDV-25.000MHZ-LC-T

## Free pads (board coordinates)
  round 6 hole 3 mask+0.05: 2(4.5,105.75) 2(4.525,3.85) 2(118.975,5.45) 2(119.75,105.9)

## Via types
v1: diameter 0.4, hole 0.15, S1 (SIG) to S10 (SIG), tented both sides, 746 vias
v2: diameter 0.5, hole 0.25, S1 (SIG) to S10 (SIG), tented both sides, 108 vias
v3: diameter 0.5, hole 0.2, S1 (SIG) to S10 (SIG), tented both sides, 11 vias
v4: diameter 0.6, hole 0.3, S1 (SIG) to S10 (SIG), tented both sides, 10 vias
v5: diameter 0.45, hole 0.15, S1 (SIG) to S10 (SIG), tented both sides, 1 vias

## Nets (pads, with @x,y where several pads share a name; then routed paths per layer and width w, separated by ;. In a path a pad name is that pad's centre, name@x,y a point inside that pad or via, vN(x,y) a via of type N, cw(c..) or ccw(c..) an arc to the next point about the centre after c; other vN are vias at no path point)
1V0_EN: R200.1 U200.1
1V0_FB: C200.1 R201.1 R204.2 U200.2
1V0_PG: R202.1 R207.2 U200.8
1V0_SW: L200.1 U200.6
1V8_EN: R207.1 U202.1
1V8_FB: C207.1 R206.1 R209.2 U202.2
1V8_PG: R208.1 R213.2 U202.8
1V8_SW: L201.1 U202.6
1V35_EN: R213.1 U204.1
1V35_FB: C215.1 R212.1 R215.2 U204.2
1V35_PG: R214.1 R217.2 U204.8
1V35_SW: L202.1 U204.6
3V3_EN: R217.1 U205.1
3V3_FB: C219.1 R216.1 R218.2 U205.2
3V3_PG: C802.2 R211.2 R801.1 U205.8 U800.2
3V3_PG_R: Q200.1 R211.1
3V3_SW: L203.1 U205.6
+1V0: C200.2 C201.2 C202.2 C303.1 C304.2 C305.2 C306.2 C307.2 C308.2 C309.2 C319.2 C320.2 C321.2 C322.2 C323.1 C347.2 C348.2 C349.1 L200.2 R201.2 U300.G7 U300.G11 U300.G13 U300.H10 U300.H12 U300.J7 U300.J13 U300.K12 U300.L7 U300.L13 U300.M12 U300.N7 U300.N13 U300.P8 U300.P12 U300.R7 U300.R13 | length 33.6
  S1 (SIG) w0.3: v1(57.888,53.595) U300.P8@59.088,54.795 ; v1(57.888,55.195) U300.N7@58.288,55.595 ; v1(57.888,56.795) U300.L7@58.288,57.195 ; v1(57.888,59.195) U300.J7@58.288,58.795 ; v1(57.888,60.795) U300.G7@58.288,60.395 ; v1(60.288,59.995) U300.H10@60.688,59.595 ; U300.G11@61.488,60.395 v1(61.888,60.795) ; U300.P12@62.288,54.795 v1(62.688,54.395) U300.R13@63.088,53.995 v1(63.488,53.595) ; U300.M12@62.288,56.395 v1(62.688,55.995) ; U300.H12@62.288,59.595 v1(62.688,59.995) ; v1(62.688,58.395) U300.K12@62.288,57.995 U300.L13@63.088,57.195 v1(63.488,56.795) ; U300.N13@63.088,55.595 v1(63.488,55.195) ; U300.J13@63.088,58.795 v1(63.488,59.195) ; U300.G13@63.088,60.395 63.488,60.795 ; U300.R7@58.288,53.995 U300.P8@59.088,54.795 ; U300.R7@58.288,53.995 U300.P8@59.088,54.795 ; U300.R7@58.288,53.995 U300.P8@59.088,54.795 ; U300.R7@58.288,53.995 U300.P8@59.088,54.795 ; U300.R7@58.288,53.995 U300.P8@59.088,54.795 ; U300.R7@58.288,53.995 U300.P8@59.088,54.795 ; U300.R7@58.288,53.995 U300.P8@59.088,54.795
  S10 (SIG) w0.3: v1(57.888,53.595) 57.907,53.614 58.414,53.614 C320.2@58.5,53.7 ; C308.2@57.9,57.5 57.894,57.494 57.894,56.801 v1(57.888,56.795) v1(57.888,55.195) 57.907,55.214 58.514,55.214 C309.2@58.6,55.3 ; v1(60.288,59.995) 60.315,59.995 60.381,60.061 60.404,60.061 60.64,60.297 60.767,60.297 60.783,60.312 60.993,60.312 C319.2@61.093,60.412 ; C306.2@60.932,61.35 61.332,61.35 v1(61.888,60.795) ; v1(62.688,54.395) v1(63.488,55.195) ; v1(62.688,58.395) v1(63.488,59.195) v1(62.688,59.995) ; C321.2@62.8,53.7 62.886,53.614 63.468,53.614 v1(63.488,53.595) ; C347.2@63.55,57.6 63.55,56.884 63.488,56.822 v1(63.488,56.795) v1(62.688,55.995) v1(63.488,55.195) ; C307.2@64.2,55.15 64.174,55.176 63.507,55.176 v1(63.488,55.195)
+1V0_ETH: C1107.2 C1108.2 C1109.2 C1114.2 C1115.2 C1116.2 L1100.2 U1100.3 U1100.8 U1100.21 U1100.38 | length 13.5
  S1 (SIG) w0.2: 102.475,80.325 102.6,80.45 U1100.21@102.6,80.7 ; v2(103.375,87.7) 103.4,87.675 U1100.8@103.4,85.56 ; U1100.3@105.4,85.56 105.4,86.769 105.637,87.005 105.637,87.786 v2(105.65,87.8) ; U1100.38@106.835,84.115 108.44,84.115 v2(108.95,84.625)
  S1 (SIG) w0.3: v2(101.075,79.775) 101.2,79.775 101.616,80.191 102.341,80.191 102.475,80.325
  S10 (SIG) w0.3: v2(101.075,79.775) 101.95,79.775 C1115.2@102.25,79.475 ; C1109.2@103.375,86.825 v2(103.375,87.7) ; C1116.2@104.9,86.85 104.9,86.875 105.612,87.587 105.612,87.762 v2(105.65,87.8) ; C1114.2@108.35,83.65 108.95,84.25 v2(108.95,84.625)
+1V8: C207.2 C208.2 C209.2 C313.2 C314.2 C315.1 C316.2 C317.2 C318.2 C331.1 C332.2 C333.2 C804.2 C805.2 C1002.2 C1003.2 C1004.2 C1110.2 C1111.2 C1301.2 FB300.2 FB1101.1 FB1501.1 FB1502.1 FB1503.1 J2.70 J2.72 J2.74 J2.76 J2.78 L201.2 Q800.1 Q1200.1 Q1201.1 Q1300.1 Q1301.1 R206.2 R800.2 R803.2 R818.2 R1001.2 R1201.1 R1204.1 R1302.1 R1306.1 S801.3 S801.4 S802.3 S802.4 U300.A13 U300.B16 U300.D12 U300.E15 U300.F8 U300.F11 U300.G9 U300.H8 U300.J9 U300.J11 U300.K8 U300.L11 U300.M8 U300.N9 U300.N11 U300.P10 U300.R9 U802.5 U803.5 U1000.11 U1000.28 U1000.30 U1000.32 U1301.B2 U1301.C2 | length 32.6
  S1 (SIG) w0.11: U1301.B2@83.95,23.2 U1301.C2@84.45,23.2 85.15,23.9 C1301.2@86.275,23.9
  S1 (SIG) w0.3: v1(58.688,55.995) U300.M8@59.088,56.395 ; v1@58.688,58.395 U300.K8@59.088,57.995 ; v1(58.688,59.995) U300.H8@59.088,59.595 ; U300.F8@59.088,61.195 v1(59.488,60.795) U300.G9@59.888,60.395 ; v1(59.488,59.195) U300.J9@59.888,58.795 ; U300.R9@59.888,53.995 v1(60.288,54.395) U300.P10@60.688,54.795 ; U300.N11@61.488,55.595 v1(61.888,55.195) ; U300.L11@61.488,57.195 v1(61.888,56.795) ; U300.J11@61.488,58.795 v1(61.888,59.195) ; U300.F11@61.488,61.195 v1(61.888,61.595) ; U300.D12@62.288,62.795 v1(62.688,63.195) ; U300.A13@63.088,65.195 v1@63.088,65.752 ; U300.E15@64.688,61.995 v1(65.088,62.395) ; v1(65.088,64.795) U300.B16@65.488,64.395 ; v1(77.95,98.05) U1000.32@79.725,98.05 ; v1(77.95,100.05) U1000.28@79.725,100.05 ; v1(78.45,99) 78.477,99 78.527,99.05 U1000.30@79.53,99.05 ; U1000.11@84.475,99.05 v1(86.25,99.05)
  S10 (SIG) w0.3: v1(58.688,55.995) 58.715,55.995 58.909,55.8 59.004,55.8 59.15,55.654 59.15,55.532 v1(60.288,54.395) 60.943,55.05 61.716,55.05 61.861,55.195 v1(61.888,55.195) ; C333.2@58.7,57.6 58.69,57.61 58.69,58.393 v1(58.68,58.404) 58.688,58.404 59.479,59.195 v1(59.488,59.195) v1(58.688,59.995) v1(59.488,60.795) ; C317.2@61.1,57 61.305,56.795 v1(61.888,56.795) ; C313.2@62.4,65.5 62.4,65.55 62.5,65.65 62.55,65.65 62.638,65.738 63.074,65.738 v1(63.093,65.757) ; v1(77.95,98.05) 77.977,98.05 78.177,97.85 78.575,97.85 C1004.2@78.9,97.525 ; v1(77.95,100.05) 78.675,100.05 C1002.2@78.875,99.85 78.55,99.525 78.525,99.525 78.525,99.102 78.45,99.027 v1(78.45,99) ; C1003.2@85.4,99.7 85.425,99.7 86.056,99.069 86.231,99.069 v1(86.25,99.05)
  other v1: 59.488,55.195
+1V8_ETH: C1112.2 C1113.2 FB1101.2 R1100.2 R1101.2 R1102.2 R1103.2 R1113.2 R1114.2 U1100.28 | length 2.4
  S1 (SIG) w0.2: U1100.28@105.39,80.69 105.39,79.475 v2(105.475,79.475)
  S10 (SIG) w0.3: C1112.2@104.525,79.15 104.85,79.475 v2(105.475,79.475)
+1V8_HDMI_AVDD: C1503.2 C1504.2 C1505.2 C1506.2 C1507.2 FB1501.2 U1500.24 U1500.25 U1500.29 U1500.34 U1500.41
+1V8_HDMI_DVDD: C1512.2 C1513.2 C1514.2 C1515.2 C1516.2 C1517.2 FB1503.2 R1501.2 R1502.2 U1500.1 U1500.19 U1500.49 U1500.76 U1500.77
+1V8_HDMI_PLVDD: C1508.2 C1509.2 C1510.2 FB1502.2 U1500.21 U1500.26
+1V8_PLL: C300.2 C301.2 FB300.1 U300.G8 | length 1.8
  S1 (SIG) w0.3: v1(58.688,60.795) U300.G8@59.088,60.395
  S10 (SIG) w0.3: v1(58.688,60.795) 58.745,60.795 59,61.05 59.004,61.05 59.15,61.196 59.15,61.2 C300.2@59.55,61.6
+1V35: C214.2 C215.2 C216.2 C217.2 C341.2 C342.2 C343.2 C344.2 C345.2 C346.1 C701.2 C702.2 C703.2 C704.2 C705.2 C707.2 C708.2 C709.2 C710.2 C711.2 C714.2 C715.2 C716.2 C717.2 C718.2 C719.2 C720.2 C721.2 C722.2 C723.2 C725.2 C726.2 C727.2 C728.2 C729.2 C731.2 C732.2 C733.2 C734.2 C735.2 C736.2 C737.2 C738.2 C739.2 C740.2 C741.2 C742.2 C743.2 C744.2 C745.2 L202.2 R212.2 R625.2 U203.1 U203.2 U300.A3 U300.D2 U300.E5 U300.G1 U300.H4 U300.L3 U300.P2 U300.R5 U300.U1 U300.V4 U700.A1 U700.A8 U700.B2 U700.C1 U700.C9 U700.D2 U700.D9 U700.E9 U700.F1 U700.G7 U700.H2 U700.H9 U700.K2 U700.K8 U700.N1 U700.N9 U700.R1 U700.R9 U701.A1 U701.A8 U701.B2 U701.C1 U701.C9 U701.D2 U701.D9 U701.E9 U701.F1 U701.G7 U701.H2 U701.H9 U701.K2 U701.K8 U701.N1 U701.N9 U701.R1 U701.R9 | length 54.9
  S1 (SIG) w0.3: v1(31.3,46.55) U701.R9@31.7,46.95 ; v1(31.3,53.75) U701.R1@31.7,53.35 ; v1(31.3,62) U700.R9@31.7,62.4 ; v1(31.3,69.2) U700.R1@31.7,68.8 ; v1(32.9,46.55) U701.N9@33.3,46.95 ; v1(32.9,62) U700.N9@33.3,62.4 ; v1(32.9,69.2) U700.N1@33.3,68.8 ; U701.N1@33.3,53.35 v1(33.7,53.75) ; v1(35.3,48.15) U701.K8@35.7,47.75 ; v1(35.3,63.6) U700.K8@35.7,63.2 ; U701.K2@35.7,52.55 v1(36.1,52.15) ; U700.K2@35.7,68 v1(36.1,67.6) ; v1(36.9,46.55) U701.H9@37.3,46.95 ; v1(36.9,62.8) U700.H9@37.3,62.4 ; U701.H2@37.3,52.55 v1(37.7,52.95) ; U700.H2@37.3,68 v1(37.7,68.4) ; U701.G7@38.1,48.55 v1(38.5,48.15) ; U700.G7@38.1,64 v1(38.5,63.6) ; v1(38.5,53.75) U701.F1@38.9,53.35 ; v1(38.5,69.2) U700.F1@38.9,68.8 ; v1(39.3,46.55) U701.E9@39.7,46.95 ; v1(39.3,62) U700.E9@39.7,62.4 ; v1(40.1,52.95) U701.D2@40.5,52.55 ; v1(40.1,62.8) U700.D9@40.5,62.4 ; U700.D2@40.5,68 v1(40.9,67.6) ; v1(40.9,53.75) U701.C1@41.3,53.35 ; v1(40.9,69.2) U700.C1@41.3,68.8 ; v1(41.3,46.375) U701.C9@41.3,46.95 U701.C9@41.313,46.937 ; U700.C9@41.3,62.4 41.313,62.387 41.313,61.937 v1(41.325,61.925) ; v1(41.7,52.15) U701.B2@42.1,52.55 ; v1(41.7,67.6) U700.B2@42.1,68 ; U701.A8@42.9,47.75 42.913,47.737 43.413,47.737 v1(43.425,47.725) ; U701.A1@42.9,53.35 v1(43.3,53.75) ; U700.A8@42.9,63.2 42.913,63.187 43.413,63.187 v1(43.425,63.175) ; U700.A1@42.9,68.8 v1(43.3,69.2) ; v1(52.913,52.395) U300.U1@53.488,52.395 ; v1@52.93,60.395 U300.G1@53.488,60.395 ; v1(53.888,54.395) U300.P2@54.288,54.795 ; v1(54.688,56.795) U300.L3@55.088,57.195 ; U300.A3@55.088,65.195 55.088,65.752 v1(55.093,65.757) ; v1(55.488,51.195) U300.V4@55.888,51.595 ; v1(55.488,59.995) U300.H4@55.888,59.595 ; v1(56.288,53.595) U300.R5@56.688,53.995 ; v1(56.288,62.395) U300.E5@56.688,61.995
  S10 (SIG) w0.3: C723.2@31.225,54.475 31.281,54.419 31.281,53.769 v1(31.3,53.75) ; C704.2@31.225,61.25 31.281,61.306 31.281,61.981 v1(31.3,62) ; C743.2@31.275,69.925 31.288,69.912 31.288,69.212 v1(31.3,69.2) ; v1(31.3,46.55) 31.313,46.537 31.313,45.837 C722.2@31.325,45.825 ; C703.2@32.825,61.325 32.881,61.381 32.881,61.981 v1(32.9,62) ; v1(32.9,46.55) 32.919,46.531 32.919,45.906 C710.2@33,45.825 ; v1(32.9,69.2) 32.919,69.219 32.919,69.869 C742.2@32.975,69.925 ; C711.2@33.65,54.45 33.681,54.419 33.681,53.769 v1(33.7,53.75) ; C740.2@34.375,48.925 34.375,48.875 34.65,48.6 34.696,48.6 34.921,48.375 35.048,48.375 35.273,48.15 v1(35.3,48.15) ; C702.2@35.2,62.8 35.3,62.9 35.3,63.126 v1(35.3,63.6) ; C744.2@35.925,68.375 36.025,68.275 36.025,67.937 36.045,67.917 36.045,67.855 36.081,67.82 36.081,67.619 v1(36.1,67.6) ; C729.2@35.975,52.85 36.075,52.75 36.075,52.202 36.1,52.177 v1(36.1,52.15) ; C709.2@36.8,45.8 36.881,45.881 36.881,46.531 v1(36.9,46.55) ; C705.2@36.9,62.2 v1(36.9,62.8) ; C726.2@37.575,53.8 37.575,53.102 37.7,52.977 v1(37.7,52.95) ; v1(37.7,68.4) C745.2@37.7,69.25 ; C725.2@38.35,54.5 38.45,54.4 38.45,53.827 38.5,53.777 v1(38.5,53.75) ; C731.2@38.35,70.05 38.427,69.973 38.427,69.3 38.5,69.227 v1(38.5,69.2) ; v1(38.5,63.6) 38.519,63.581 38.519,62.956 C701.2@38.575,62.9 ; v1(39.3,46.55) 39.319,46.531 39.319,45.906 C721.2@39.4,45.825 ; v1(39.3,62) 39.3,61.973 39.381,61.892 C718.2@39.381,61.244 ; v1(40.1,52.95) 40.119,52.969 40.594,52.969 40.725,53.1 C728.2@40.775,53.1 ; v1(40.1,62.8) 40.127,62.8 40.252,62.675 40.725,62.675 C716.2@40.825,62.575 ; v1(40.9,53.75) 40.9,53.777 40.95,53.827 40.95,54.375 C738.2@41.05,54.475 ; v1(40.9,67.6) 40.9,67.627 40.95,67.677 40.95,68.275 C734.2@41.05,68.375 ; v1(40.9,69.2) 40.919,69.219 41.069,69.219 41.7,69.85 C732.2@41.7,69.9 ; v1(41.3,46.375) 41.319,46.356 41.319,46.032 41.69,45.66 C737.2@41.69,45.584 ; v1(41.325,61.925) 41.325,61.898 41.534,61.689 41.534,61.344 C717.2@41.634,61.244 ; C735.2@41.65,66.875 41.681,66.906 41.681,67.581 v1(41.7,67.6) ; v1(41.7,52.15) 42.325,52.775 C727.2@42.325,52.825 ; v1(43.3,69.2) 43.319,69.219 43.319,69.769 C733.2@43.4,69.85 ; v1(43.425,47.725) 43.444,47.744 44.169,47.744 C708.2@44.225,47.8 ; v1(43.425,63.175) 43.444,63.156 43.669,63.156 43.975,62.85 C715.2@44.025,62.85 ; v1@52.913,52.406 53.2,52.693 C342.2@53.2,53.025 ; C344.2@54.05,57.05 54.305,56.795 v1(54.688,56.795) ; C343.2@54.419,65.283 54.893,65.757 v1(55.093,65.757) ; v1(55.488,51.195) 55.488,51.168 55.625,51.03 C341.2@55.625,50.275
  other v1: 52.925,60.4
+3V3: C211.2 C219.2 C220.2 C221.2 C302.2 C310.2 C311.2 C312.1 C324.2 C325.2 C326.2 C327.2 C328.2 C329.2 C330.2 C334.2 C335.2 C336.2 C337.2 C338.2 C339.2 C340.2 C350.2 C351.2 C352.2 C353.2 C354.2 C355.2 C356.2 C516.2 C800.2 C806.2 C900.2 C901.2 C902.2 C903.2 C904.2 C905.2 C906.2 C907.2 C908.2 C909.2 C912.2 C1000.2 C1001.2 C1008.2 C1100.2 C1101.2 C1105.2 C1106.2 C1117.2 C1305.2 C1306.2 C1520.2 FB1100.2 FB1500.1 J1.3 J1.4 J1.5 J1.6 J1.9 J1.10 J1.11 J1.12 J1.15 J1.16 J1.17 J1.18 J2.46 J2.48 J2.50 J2.52 J2.54 J501.6 J1100.11 J1100.14 J1600.15 J1600.15_1 L203.2 R216.2 R400.2 R401.2 R402.2 R403.2 R404.2 R405.2 R801.2 R805.2 R808.1 R819.2 R900.2 R901.2 R902.2 R903.2 R904.2 R905.2 R906.2 R908.2 R909.2 R910.2 R1003.1 R1004.2 R1115.1 R1116.1 R1303.1 R1304.2 R1307.1 R1400.1 R1500.2 R1506.2 R1507.2 R1508.2 R1604.2 R1605.2 S1400.3 S1400.4 S1401.3 S1401.4 S1402.3 S1402.4 S1403.3 S1403.4 S1404.3 S1404.4 S1405.3 S1405.4 SW900.4 SW900.5 SW900.6 U203.7 U203.9 U203.10 U300.B6 U300.C19 U300.D7 U300.F18 U300.H14 U300.J17 U300.K6 U300.K20 U300.M6 U300.M16 U300.N6 U300.N19 U300.R6 U300.R15 U300.T6 U300.T8 U300.T18 U300.U11 U300.V14 U300.W7 U300.W17 U300.Y10 U300.Y20 U800.5 U900.C6 U900.E6 U900.F5 U900.J10 U900.K9 U900.M4 U900.N4 U900.P3 U900.P5 U901.8 U1000.20 U1000.21 U1100.29 U1302.8 X800.1 X800.4 X1000.1 X1000.4 X1100.1 X1100.4 X1500.1 X1500.4 | length 56
  S1 (SIG) w0.2: C912.2@51.3,84.15 51.325,84.15 52.807,82.668 U901.8@52.807,81.868 ; U900.J10@68.246,86.35 U900.K9@68.746,86.85 68.746,86.864 68.56,87.051 68.56,87.237 v1(68.521,87.275) ; v1(69.646,83.85) 69.685,83.812 69.785,83.812 U900.C6@70.246,83.35 ; v1(70.11,85.04) 70.246,84.904 U900.E6@70.246,84.35 U900.F5@70.746,84.85 ; U900.P5@70.746,88.85 U900.N4@71.246,88.35 ; U900.F5@70.746,84.85 v1(71.2,84.85) ; U900.M4@71.246,87.85 U900.N4@71.246,88.35 ; v1(72.2,89.525) 72.162,89.487 72.162,89.266 U900.P3@71.746,88.85 U900.N4@71.246,88.35 ; U1100.29@105.8,80.7 105.8,80.05 106.3,79.55 v2(106.3,79.125)
  S1 (SIG) w0.3: R403.2@42.225,17.05 42.238,17.063 43.238,17.063 v4(43.25,17.075) ; v1(57.088,52.795) U300.T6@57.488,53.195 v1(57.088,53.595) U300.R6@57.488,53.995 ; v1(57.088,58.395) U300.K6@57.488,57.995 ; U300.B6@57.488,64.395 v1(57.888,64.795) ; v1(57.888,63.195) U300.D7@58.288,62.795 ; U300.W7@58.288,50.795 v1(58.688,50.395) ; v1(58.688,52.795) U300.T8@59.088,53.195 ; v1(60.288,50.395) U300.Y10@60.688,49.995 ; U300.U11@61.488,52.395 v1(61.888,51.995) ; U300.V14@63.888,51.595 v1(64.288,51.195) ; U300.R15@64.688,53.995 v1(65.088,53.595) ; U300.M16@65.488,56.395 v1(65.888,55.995) ; U300.W17@66.288,50.795 v1(66.688,50.395) ; U300.J17@66.288,58.795 v1(66.688,59.195) ; U300.T18@67.088,53.195 v1(67.488,52.795) ; U300.F18@67.088,61.195 v1(67.488,61.595) ; U300.N19@67.888,55.595 v1(68.288,55.995) ; U300.C19@67.888,63.595 v1(68.288,63.995) ; v1(68.288,58.395) U300.K20@68.688,57.995 ; U300.Y20@68.688,49.995 v1(69.088,50.395) ; U1000.21@81.85,102.175 v1(81.85,103.95) ; U1000.20@82.35,102.175 v1(82.35,104.3)
  S1 (SIG) w1: U1302.8@95.345,10.5 98.425,10.5 C1306.2@98.5,10.425
  S10 (SIG) w0.2: 58.288,63.758 58.288,64.139 58.294,64.146 58.294,64.17 58.297,64.173 58.297,64.292 ; C902.2@67.025,87.225 67.075,87.275 v1(68.521,87.275) ; C905.2@69.3,82.825 69.3,82.85 69.646,83.196 v1(69.646,83.85) ; v1(70.11,85.04) 70.11,85.514 C901.2@70.471,85.875 ; v1(71.2,84.85) 71.875,84.85 C900.2@72.075,85.05 ; v1(72.2,89.525) 72.2,90.4 C907.2@72.225,90.425
  S10 (SIG) w0.3: C356.2@56.9,57.6 57,57.7 57,58.28 57.088,58.368 v1(57.088,58.395) ; C355.2@57.35,65.6 57.35,65.55 57.596,65.304 57.596,65.3 57.715,65.182 57.715,64.995 57.888,64.822 v1(57.888,64.795) ; v1(57.888,63.195) 57.888,63.222 58.288,63.622 58.288,63.758 ; C337.2@58.25,49.8 58.25,49.85 58.668,50.268 58.668,50.376 v1(58.688,50.395) ; 58.297,64.292 58.425,64.42 58.425,64.675 C310.2@58.525,64.775 ; v1(60.288,50.395) 60.288,49.576 60.463,49.4 C338.2@61.15,49.4 ; R402.2@63.85,49.975 63.85,50.9 63.582,51.168 C329.2@63.582,51.282 63.617,51.246 64.209,51.246 64.261,51.195 v1(64.288,51.195) ; v1(65.888,55.995) 65.907,56.014 65.907,56.607 C330.2@66,56.7 ; v1(67.488,52.795) 67.507,52.776 67.91,52.776 68.222,52.464 C339.2@68.364,52.464 ; v1(67.488,61.595) 67.507,61.576 67.547,61.576 67.94,61.182 C328.2@68.082,61.182 ; v1(68.288,55.995) 68.307,56.014 68.307,56.07 C354.2@68.818,56.582 ; v1(68.288,58.395) 68.307,58.414 68.514,58.414 68.85,58.75 C353.2@68.9,58.75 ; v1(68.288,63.995) 68.307,64.014 68.575,64.014 C326.2@69.23,64.67 ; v1(69.088,50.395) 69.088,50.422 69.518,50.852 C340.2@69.518,50.982 ; v1(81.85,103.95) 81.85,103.923 81.9,103.873 C1001.2@81.9,103.15 ; v1(82.35,104.3) 82.369,104.281 82.369,103.931 82.55,103.75 83.1,103.75 C1000.2@83.175,103.825
  S10 (SIG) w1: C516.2@33.7,106.6 33.924,106.824 33.924,108.659 J501.6@34.115,108.85
  other v1: 57.088,55.195 57.088,55.995 64.288,59.995 61.65,87.65 62.875,87.65 61.65,88.275 62.875,88.275 76.31,90.275 76.95,90.275 72.225,92.55 70.5,94.275 69.8,94.3 73.475,94.325
+3V3_ETH: C1102.2 C1103.2 C1104.2 FB1100.1 U1100.11 U1100.40 | length 4.9
  S1 (SIG) w0.2: v2(100.925,85.65) 101.65,84.925 U1100.11@101.975,84.925 ; U1100.40@106.835,84.915 108.05,84.915 v2(108.05,85)
  S10 (SIG) w0.3: v2(100.925,85.65) 101.525,85.65 C1102.2@101.8,85.375 ; C1104.2@107.9,86.225 108.05,86.075 v2(108.05,85)
+3V3_FTDI: C508.2 C509.2 C510.2 C511.2 C512.2 C515.2 FB501.2 FB502.2 R504.1 U500.12 U500.24 U500.39 U500.46 X500.1 X500.4 | length 32.4
  S1 (SIG) w0.2: 50.686,94.711 51.039,94.711 51.3,94.45
  S1 (SIG) w0.3: v1(39.5,93.775) 39.527,93.775 39.552,93.8 U500.24@40.625,93.8 v1(41.698,93.8) ; FB501.2@40.55,100.6 40.55,100.575 40.875,100.25 41.502,100.25 v1(42.075,99.677) U500.12@42.075,100.75 42.075,101.823 42.05,101.848 v1(42.05,101.875) ; v1(47.952,94.8) U500.39@49.025,94.8 50.098,94.8 50.123,94.825 v1(50.15,94.825) 50.169,94.806 50.591,94.806 50.686,94.711 ; v1(47.952,98.3) U500.46@49.025,98.3 50.098,98.3 50.123,98.325 v1(50.15,98.325) 50.169,98.344 50.419,98.344 50.875,98.8 50.875,100.05 50.6,100.325 50.075,100.325 49.75,100.65 FB502.2@49.75,100.675 ; 51.3,94.45 51.5,94.45 52.125,93.825 C508.2@52.925,93.825
  S10 (SIG) w0.3: v1(41.698,93.8) C512.2@42.75,93.8 ; v1(42.075,99.677) 42.075,99.075 C511.2@42.325,98.825 ; C509.2@46.725,95.825 46.95,95.6 R504.1@46.95,94.55 47.2,94.8 v1(47.952,94.8) ; C510.2@47.05,98.525 47.275,98.3 v1(47.952,98.3) ; v1(50.15,98.325) 52.6,98.325 54.1,99.825 C515.2@54.1,101.825 54.075,101.85 X500.1@52.7,101.85 X500.4@52.7,103.3
+3V3_HDMI: C1500.2 C1501.2 C1502.2 FB1500.2 U1500.47
+3V_UART: C1202.2 C1203.2 R1200.1 R1202.2 R1203.1 U1200.6 | length 25.3
  S1 (SIG) w0.2: U1200.6@65.45,99.825 66.594,99.825 66.844,100.075 v3(66.925,100.075)
  S1 (SIG) w0.3: R1203.1@64.05,94.275 64.075,94.3 64.8,94.3 v3(64.825,94.325) ; R1200.1@64.775,95.25 64.788,95.237 65.438,95.237 v3(65.45,95.225) ; v3(66.925,100.075) 66.95,100.1 67.275,100.1 67.35,100.025
  S1 (SIG) w0.35: v3(62.45,102.225) 62.479,102.254 63.054,102.254 R1202.2@63.1,102.3
  S1 (SIG) w0.45: 67.35,100.025 67.575,99.8 67.575,99.775
  S1 (SIG) w0.65: 67.575,99.45 67.575,99.775
  S1 (SIG) w0.8: C1202.2@67.4,98.8 67.475,98.875 67.475,99.35 67.575,99.45
  S1 (SIG) w1: C1202.2@67.4,98.775 68.575,98.775 C1203.2@68.6,98.75
  S10 (SIG) w0.3: v3(62.45,102.225) 63.625,102.225 65.125,103.725 66.725,103.725 68.325,102.125 68.325,100.425 67.975,100.075 v3(66.925,100.075) 66.925,100.035 67.4,99.56 67.4,95.401 67.224,95.225 v3(65.45,95.225) 65.412,95.187 65.412,94.912 v3(64.825,94.325)
+5V: C203.2 C205.2 C210.2 C218.2 C222.2 C1007.2 C1300.2 C1302.2 C1303.2 C1511.2 J1500.18 R200.2 R202.2 R208.2 R210.2 R214.2 R1503.2 R1504.2 U200.7 U201.6 U201.7 U201.8 U202.7 U204.7 U205.7 U1001.5 U1300.3 U1301.A2 | length 3.9
  S1 (SIG) w0.11: C1302.2@82.225,23.875 82.225,23.85 82.875,23.2 U1301.A2@83.45,23.2
  S1 (SIG) w0.3: v2(59,8.204) 59.175,8.379 J1500.18@59.175,9.513
  S10 (SIG) w0.3: C1511.2@58.625,7.35 58.65,7.35 58.975,7.675 58.975,8.179 v2(59,8.204)
+5V_FTDI: C500.2 C501.2 C507.2 FB500.2 U500.40 | length 12
  S1 (SIG) w0.3: v1(47.952,95.3) U500.40@49.025,95.3 51.175,95.3 C500.2@51.3,95.425 51.325,95.45 C501.2@52.6,95.45 52.8,95.65 53.524,95.65 53.7,95.826 53.7,100.225 C507.2@53.5,100.425 53.55,100.475 FB500.2@53.55,101.775
  other v1: 50.15,95.325
+5V_UART: C1200.2 C1201.2 C1205.2 FB1200.2 U1200.7 U1200.8 | length 10.4